# Altium PCB EG2131.PcbDoc
Units mm, origin at the board's own origin, x right, y up, seen from the top; angles counter-clockwise.
Board outline 100.25 x 60.25 mm, 2 copper layers (Top Layer, Bottom Layer); 38 components, 20 nets, 92 pads, 7 vias.
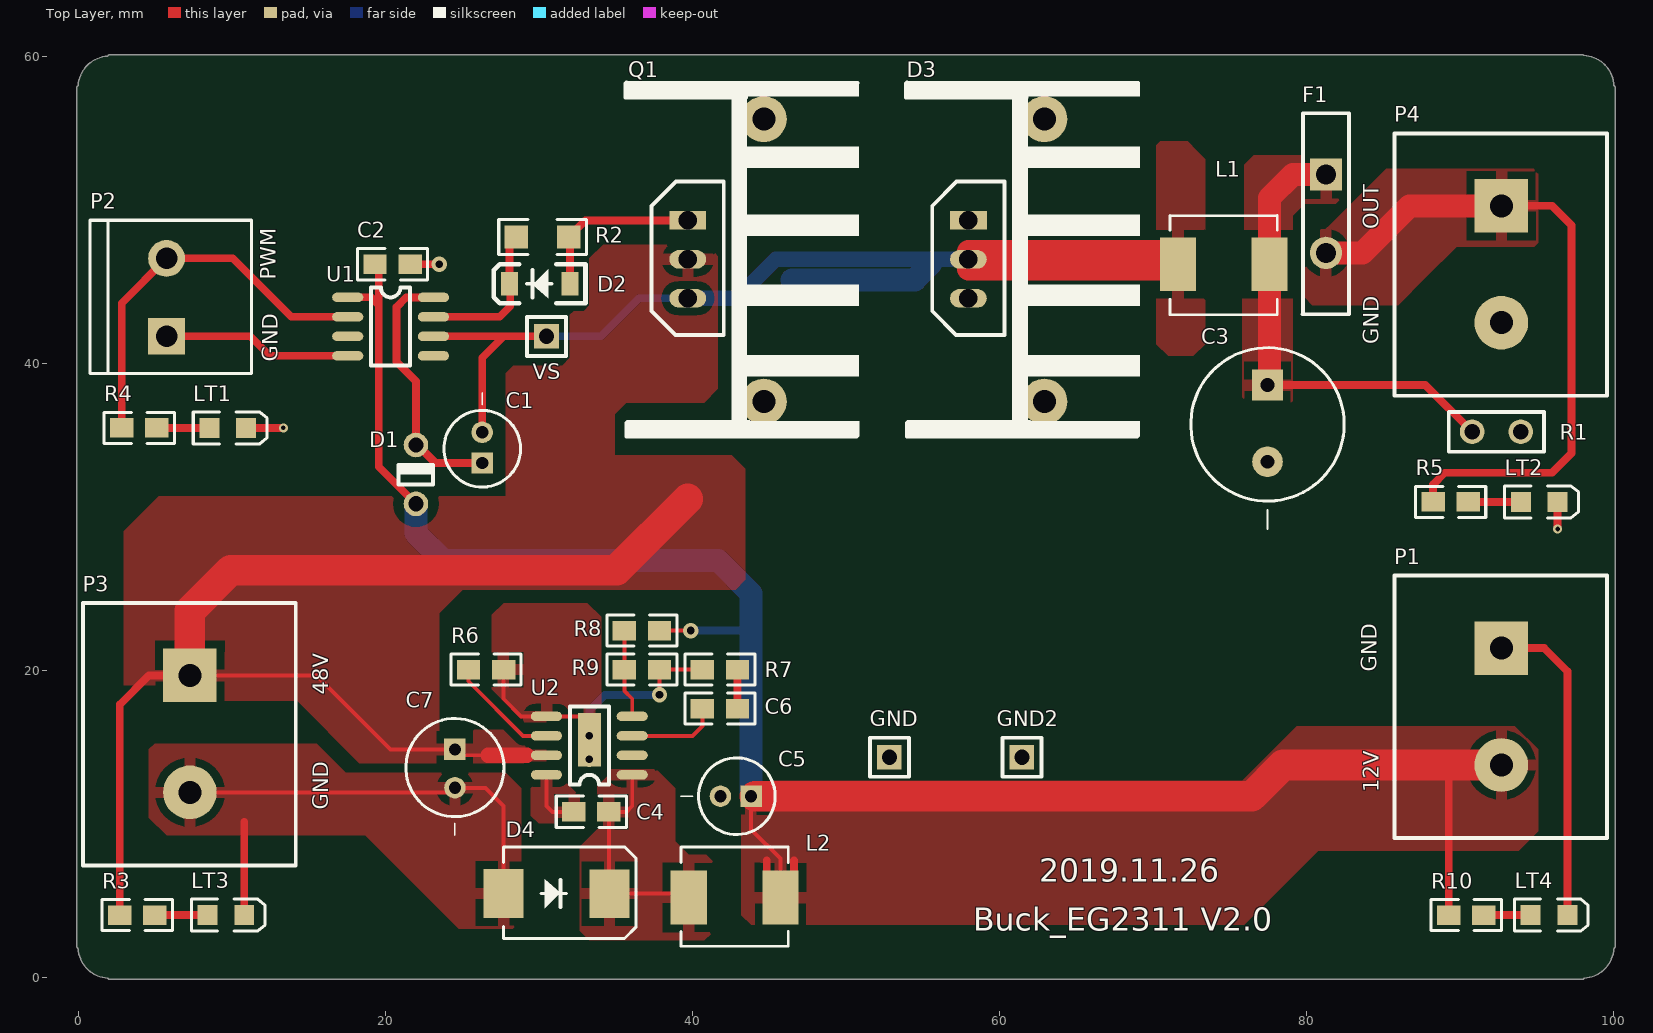
[diagram p0: Top Layer view]
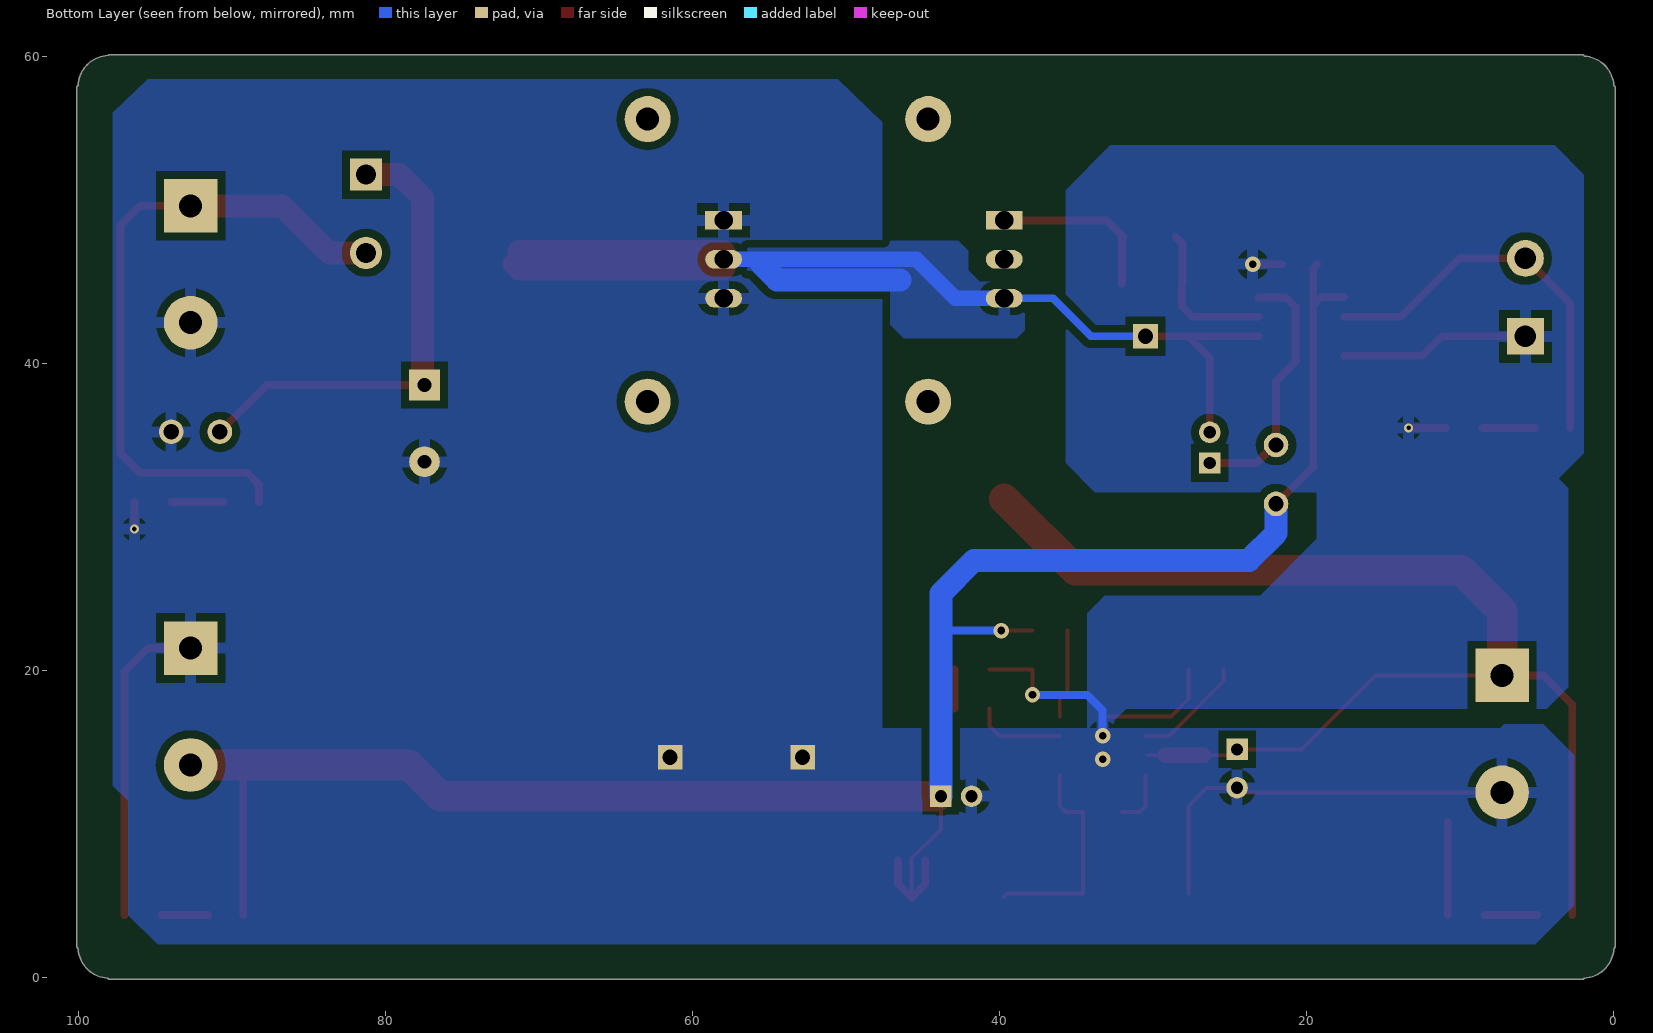
[diagram p1: Bottom Layer view, seen from below]

## Layer stack, top to bottom
Top Layer: signal copper 0.0356
Dielectric: dielectric 0.32, FR-4, Dk 4.8
Bottom Layer: signal copper 0.0356

## Board outline
-0.047,1.882 ccw(c2,2) 1.882,-0.047 ccw(c2,0) 2,-0.127 98,-0.127 ccw(c98,0) 98.118,-0.047 ccw(c98,2) 100.047,1.882 ccw(c100,2) 100.127,2 100.127,58 ccw(c100,58) 100.049,58.118 ccw(c98,58.039) 98.093,60.087 ccw(c98,60) 98,60.127 2,60.127 ccw(c2,60) 1.882,60.047 ccw(c2,58) -0.047,58.118 ccw(c0,58) -0.127,58 -0.127,2 ccw(c0,2)

## Design rules (kind name [scope] priority, off if disabled: settings)
Clearance Polygon [Inpolygon] p1: gap=0.508
Clearance [All] p2: gap=0.254
PolygonConnect [All] p1: connectstyle=Relief reliefconductorwidth=0.75 reliefentries=4 polygonreliefangle="90 Angle"
RoutingVias [All] p1: holewidth=0.5 width=1 viastyle="Through Hole" minholewidth=0.3 minwidth=0.6 maxholewidth=2 maxwidth=2
SilkToSilkClearance [All] p1: silktosilkclearance=0.1
SilkscreenOverComponentPads [All] p1: minsilkscreentomaskgap=0.254
SolderMaskExpansion [All] p1: expansion=0.102
TestPointUsage [All] p1: valid=0 allowmultiple=FALSE
Testpoint [All] p1: side=15 testpointundercomponent=TRUE minsize=1.016 maxsize=2.54 preferedsize=1.524 minholesize=0 maxholesize=1.016 preferedholesize=0.813 testpointgrid=0.025 style=1023 order=0123456789
Width [All] p1: maxlimit=5 minlimit=0.254 preferedwidth=0.254 minimp=50.000000 maximp=50.000000 favimp=50.000000
22 further rules are at their usual default settings.

## Components (designator, comment, footprint, x,y, rotation, side; value= is the part's Value field where it differs from the comment)
C1 "25V-YXJ-47uF-M 5X11，Rubycon" CAP2MM 26.289,33.528 r90 top
C2 "0.1uF/50V，X7R" 0805 20.447,46.482 r180 top
C3 "100V-YXJ-100uF-M 10X20，Rubycon" CAP5MM 77.47,38.608 r270 top
C4 "0.1uF/50V，X7R" 0805 33.401,10.795 r0 top
C5 "25V-YXJ-47uF-M 5X11，Rubycon" CAP2MM 43.815,11.811 r180 top
C6 "470pF/50V" 0805 41.783,17.526 r0 top
C7 "100V-YXJ-22uF-M 6.3X11，Rubycon" CAP2.5MM 24.511,14.859 r270 top
D1 "FR107，MDD" DO-41-3.8 21.971,30.861 r90 top
D2 "LL4148,，MDD" LL4148 32.004,45.212 r180 top
D3 "MBR2060CTG，ON" TO220-HS-2P 61.468,46.736 r270 top
D4 "SS310，MDD" SMC 31.623,5.715 r0 top
F1 "RL60-200，瑞隆源" RL60-110 81.28,52.324 r270 top
GND "Testpoint" TEST 52.832,14.351 r180 top
GND2 "Testpoint" TEST 61.468,14.351 r90 top
L1 "MWSA0603S-220MT，顺络" L_6.6*7.0 78.105,49.784 r180 top
L2 "MWSA0603S-330MT，顺络" L_6.6*7.0 39.243,1.905 r0 top
LT1 "红，0805" led0805 8.509,35.814 r0 top
LT2 "红，0805" led0805 93.98,30.988 r0 top
LT3 "红，0805" led0805 8.382,4.064 r0 top
LT4 "红，0805" led0805 94.615,4.064 r0 top
P1 "KF25C-2P ，间距7.62MM" KF25C-2P 92.71,21.463 r270 top
P2 "KF128-2P ,间距5.08" KF128-2P 5.715,41.783 r90 top
P3 "KF25C-2P ，间距7.62MM" KF25C-2P 7.239,19.685 r270 top
P4 "KF25C-2P ，间距7.62MM" KF25C-2P 92.71,50.292 r270 top
Q1 "IRF540NPbF，英飞凌" TO220-HS-2P 43.18,46.736 r270 top
R1 "10K/1W" 1w 93.98,35.56 r180 top
R2 "22R/F/金属膜" 1206 30.226,48.26 r0 top
R3 "100K/F/金属膜" 0805 3.81,4.064 r0 top
R4 "2K/F/金属膜" 0805 3.937,35.814 r0 top
R5 "10K/F/金属膜" 0805 89.408,30.988 r0 top
R6 "10K/F/金属膜" 0805 26.543,20.066 r180 top
R7 "16K/F/金属膜" 0805 41.783,20.066 r0 top
R8 "150K/F/金属膜" 0805 36.703,22.606 r180 top
R9 "10K/F/金属膜" 0805 36.703,20.066 r0 top
R10 "10K/F/金属膜" 0805 90.424,4.064 r0 top
U1 "EG2131" SO-8 17.526,44.323 r0 top
U2 "MP4560DN，MPS" SO-8-MP4560 36.068,13.208 r180 top
VS "Testpoint" TEST 30.48,41.783 r0 top

## Footprints (in the part's own frame and the unit in brackets; to place one, negate y for a bottom-side part, rotate by r counter-clockwise, add the part's x,y. Pads: shape width x height; smd on the part's side, far side on the other; paste and mask are expansions set on the pad)
1w [mm]
  round 1.6 hole 1: 1(0,0) 2(3.175,0)
  silkscreen extent -1.52,-1.3 4.7,1.3
0805 [mil]
  rect 60x50 smd: 1(45,0) 2(-45,0)
  silkscreen extent -90,-40 90,40
1206 [mil]
  rect 60x60 smd: 1(-67.5,0) 2(67.5,0)
  silkscreen extent -112,-45 112,45
CAP2.5MM [mm]
  rect 1.4x1.4 hole 0.8: 1(0,0)
  round 1.4 hole 0.8: 2(2.5,0)
  silkscreen extent -2.02,-3.2 5.59,3.2
CAP2MM [mm]
  rect 1.4x1.4 hole 0.8: 1(0,0)
  round 1.4 hole 0.8: 2(2,0)
  silkscreen extent -1.57,-2.5 4.57,2.5
CAP5MM [mm]
  rect 2x2 hole 0.9: 1(0,0)
  round 2 hole 0.9: 2(5,0)
  silkscreen extent -2.44,-5 9.4,5
DO-41-3.8 [mm]
  round 1.6 hole 1: 1(0,0) 2(3.841,0)
  silkscreen extent 1.27,-1.14 2.54,1.27
KF25C-2P [mm]
  rect 3.5x3.5 hole 1.5: 1(0,0)
  round 3.5 hole 1.5: 2(7.62,0)
  silkscreen extent -4.72,-6.96 12.38,6.9
KF128-2P [mm]
  rect 2.4x2.4 hole 1.4: 1(0,0)
  round 2.4 hole 1.4: 2(5.08,0)
  silkscreen extent -2.43,-5.54 7.59,4.98
L_6.6*7.0 [mm]
  rect 2.35x3.5 smd: 1(6.477,3.3) 2(0.508,3.3)
  silkscreen extent 0,0.13 7,6.6
led0805 [mm]
  rect 1.3x1.3 smd: 1(0,0) 2(2.4,0)
  silkscreen extent -1.05,-1.05 3.75,1.05
LL4148 [mil]
  rect 43.31x60 smd: 1(0,0) 2(155,0)
  silkscreen extent -40,-50 195,50
RL60-110 [mm]
  rect 2.1x2.1 hole 1.3: 1(0,0)
  round 2.1 hole 1.3: 2(5.1,0)
  silkscreen extent -4,-1.52 9.1,1.5
SMC [mm]
  rect 2.6x3.2 smd: 1(-3.937,-0.254)
  rect 2.6x3.15 smd: 2(2.967,-0.254)
  silkscreen extent -3.94,-3.17 4.7,2.8
SO-8 [mil]
  oval 80x24 smd: 1(0,0) 2(0,-50) 3(0,-100) 4(0,-150) 5(220,-150) 6(220,-100) 7(220,-50) 8(220,0)
  silkscreen extent 60,-175 160,25
SO-8-MP4560 [mil]
  oval 80x24 smd: 1(0,0) 2(0,-50) 3(0,-100) 4(0,-150) 5(220,-150) 6(220,-100) 7(220,-50) 8(220,0)
  rect 59.06x137.8 smd: 5(110,-90)
  silkscreen extent 60,-175 160,25
TEST [mm]
  rect 1.6x1.6 hole 1: 1(0,0)
  silkscreen extent -1.27,-1.27 1.27,1.27
TO220-HS-2P [mm]
  rect 1.2x2.4 hole 1.2: 1(-2.603,-3.493)
  oval 1.2x2.4 hole 1.2: 2(-0.063,-3.492) 3(2.477,-3.492)
  round 3 hole 1.5 unplated: ""(-9.207,1.46) ""(9.207,1.461)
  silkscreen extent -11.62,-7.56 11.49,7.69

## Part data
C1 C5 C7: library part C-E-000042, "电解电容"
C2 C4 C6: library part "Capacitor _non polarized_chip", "贴片电容"
C3: library part "Cap Pol1", "钽电容"
D1 D2 D4: library part 1N4148, "二极管"
D3: library part MBR2060
F1: library part "Fuse 1", "保险丝"
GND GND2 VS: "测试点"
L1 L2: library part Inductor, "功率电感"
LT1 LT2 LT3 LT4: library part LED2, "发光二极管"
P1 P3 P4: library part "Header 2", "栅栏式接线端子"
P2: library part "Header 2", "螺钉式PCB端子"
Q1: library part MOSFET-N, "MOSFET TO-262"
R1: "金属氧化膜电阻"
R2 R3 R4 R5 R6 R7 R8 R9 R10: "贴片电阻"
U1: "оƬ"
U2: library part MP4560, "DCDCоƬ"

## Via types
v1: diameter 1, hole 0.5, Top Layer to Bottom Layer, 5 vias
v2: diameter 0.6, hole 0.3, Top Layer to Bottom Layer, 2 vias

## Nets (pads, with @x,y where several pads share a name; then routed paths per layer and width w, separated by ;. In a path a pad name is that pad's centre, name@x,y a point inside that pad or via, vN(x,y) a via of type N, cw(c..) or ccw(c..) an arc to the next point about the centre after c; other vN are vias at no path point)
12V: C2.1 C5.1 D1.1 L2.1 P1.2 R8.2 R10.2 U1.1 | length 136.1
  Top Layer w0.254: R8.2 v1(39.878,22.606) ; C5.1 43.815,9.652 45.72,7.747 L2.1
  Top Layer w0.5: U1.1 19.05,44.323 19.558,43.815 ; C2.1 19.558,46.228 19.558,43.815 ; D1.1 19.558,33.274 19.558,43.815 ; 44.831,7.62 44.831,6.094 L2.1 46.609,6.094 46.609,7.62 ; 89.154,13.843 89.281,13.716 R10.2
  Top Layer w2: C5.1@44.069,11.811 76.454,11.811 78.486,13.843 89.154,13.843 P1.2
  Bottom Layer w0.254: 43.18,22.606 43.815,21.971
  Bottom Layer w0.508: v1(39.878,22.606) 43.18,22.606
  Bottom Layer w1.5: D1.1 21.971,28.956 23.749,27.178 41.656,27.178 43.815,25.019 43.815,21.971 C5.1
48V: C7.1 P3.1 Q1.2 R3.2 U2.7 | length 84
  Top Layer w0.254: P3.1 15.494,19.685 20.32,14.859 C7.1 24.892,14.478 26.67,14.478 ; 29.21,14.478 U2.7@30.353,14.478
  Top Layer w0.508: R3.2 2.667,17.78 4.572,19.685 P3.1
  Top Layer w1: 26.67,14.478 29.21,14.478
  Top Layer w2: P3.1 7.239,23.876 9.906,26.543 35.052,26.543 39.688,31.178
GND: C2.2 C3.2 C5.2 C7.2 D3.1 D3.3 D4.1 GND2.1 GND.1 LT1.2 LT2.2 LT3.2 LT4.2 P1.1 P2.1 P3.2 P4.2 R1.1 R6.2 R7.2 R9.1 U1.4 U2.5 | length 90.5
  Top Layer w0.254: P3.2 C7.2@24.217,12.065 ; C7.2 26.503,12.359 27.686,11.176 D4.1 ; R6.2 27.686,18.161 28.829,17.018 30.48,17.018 U2.5@32.893,17.018 ; v1(37.846,18.415) R9.1 R7.2
  Top Layer w0.508: P2.1 11.176,41.783 12.446,40.513 U1.4 ; LT3.2 10.782,10.147 ; LT1.2 v2(13.335,35.814) ; C2.2 v1(23.495,46.482) ; P1.1 95.504,21.463 97.015,19.952 LT4.2 ; v2(96.38,29.223) LT2.2
  Bottom Layer w0.508: v1@33.274,15.621 33.274,17.399 34.29,18.415 v1(37.846,18.415)
  other v1: 33.274,14.224 33.274,15.748
NetC4_2: C4.2 U2.8 | length 3.7
  Top Layer w0.254: U2.8 30.48,11.176 30.861,10.795 C4.2@32.004,10.795
NetC6_1: C6.1 R7.1 | length 2.5
  Top Layer w0.508: C6.1 R7.1
NetC6_2: C6.2 U2.3 | length 6
  Top Layer w0.254: U2.3 40.005,15.748 40.64,16.383 C6.2
NetD2_1: D2.1 Q1.1 R2.2 | length 11.3
  Top Layer w0.508: D2.1 32.004,48.197 R2.2 33.02,49.34 Q1.1
NetD2_2: D2.2 R2.1 U1.7 | length 9.9
  Top Layer w0.508: U1.7 27.432,43.053 28.118,43.739 D2.2@28.118,45.085 ; D2.2 28.067,47.816 R2.1
NetLT1_1: LT1.1 R4.1 | length 3.4
  Top Layer w0.508: R4.1 LT1.1
NetLT2_1: LT2.1 R5.1 | length 3.4
  Top Layer w0.508: R5.1 LT2.1
NetLT3_1: LT3.1 R3.1 | length 3.4
  Top Layer w0.508: R3.1 LT3.1
NetLT4_1: LT4.1 R10.1 | length 3
  Top Layer w0.5: R10.1 LT4.1
NetR6_1: R6.1 U2.6 | length 7.3
  Top Layer w0.254: R6.1 25.4,19.304 28.956,15.748 U2.6
NetR8_1: R8.1 R9.2 U2.4 | length 5.8
  Top Layer w0.254: R8.1 R9.2 35.56,18.669 36.068,18.161 U2.4
OUT1: F1.2 P4.1 R5.2 | length 43.7
  Top Layer w0.508: R5.2 88.265,32.131 89.027,32.893 96.012,32.893 97.282,34.163 97.282,49.022 96.012,50.292 P4.1
  Top Layer w1.5: F1.2 83.673,47.224 86.741,50.292 P4.1
OUT1': C3.1 F1.1 L1.2 R1.2 | length 31.2
  Top Layer w0.508: C3.1 87.757,38.608 R1.2
  Top Layer w1.5: C3.1 77.597,38.735 L1.2 77.597,50.8 79.121,52.324 F1.1
PWM1: P2.2 R4.2 U1.2 | length 25.6
  Top Layer w0.5: P2.2 10.033,46.863 13.843,43.053 U1.2
  Top Layer w0.508: R4.2 2.794,43.942 P2.2
SW: C4.1 D4.2 L2.2 U2.1 | length 14.3
  Top Layer w0.254: U2.1 36.068,11.176 35.687,10.795 C4.1 34.544,5.507 D4.2 39.495,5.461 L2.2
VB: C1.1 D1.2 U1.8 | length 16.9
  Top Layer w0.508: U1.8 21.336,44.323 20.701,43.688 20.701,40.132 21.971,38.862 21.971,36.861 21.971,34.798 23.241,33.528 C1.1
VS: C1.2 D3.2 L1.1 Q1.3 U1.6 VS.1 | length 80.4
  Top Layer w0.508: U1.6 27.686,41.783 ; C1.2 26.289,40.386 27.686,41.783 ; VS.1 27.686,41.783
  Top Layer w1.5: 57.975,46.164 L1.1@71.312,46.164 ; D3.2@57.975,47.307 L1.1@71.312,47.307 ; L1.1@71.312,46.799 L1.1
  Bottom Layer w0.508: VS.1 34.036,41.783 36.512,44.259 Q1.3
  Bottom Layer w1: Q1.3 42.862,44.259 45.402,46.799 55.499,46.799 ; 55.499,46.736 55.499,46.799 ; D3.2 55.499,46.799
  Bottom Layer w1.5: 46.482,45.466 54.483,45.466 55.499,46.482
pads on no net: D3. Q1. U1.3 U1.5 U2.2

## Polygon pours and split planes (outlines as drawn)
48V on Top Layer "Bottom Layer-No Net" (solid): 38.862,47.752 34.163,47.752 33.274,46.863 33.274,43.815 32.893,43.434 32.258,43.434 32.004,43.18 32.004,40.386 31.496,39.878 28.321,39.878 27.813,39.37 27.813,30.734 28.829,29.718 33.528,29.718 34.417,30.607 34.925,31.115 34.925,35.306 34.925,36.703 35.687,37.465 40.767,37.465 41.656,38.354 41.656,46.99 40.894,47.752 38.862,47.752
48V on Top Layer "Bottom Layer-No Net" (solid, pour order 1000): 7.239,21.209 17.145,21.209 22.225,16.129 26.543,16.129 27.559,15.113 27.559,14.732 26.797,13.97 18.288,13.97 14.224,18.034 7.366,18.034 7.239,17.907 7.239,21.082
SW on Top Layer "Bottom Layer-No Net" (solid, pour order 1001): 36.449,13.462 37.719,13.462 38.862,12.319 38.862,8.89 39.751,8.001 40.894,8.001 41.402,7.493 41.402,3.048 40.767,2.413 33.274,2.413 32.639,3.048 32.639,8.509 33.401,9.271 33.782,9.652 33.782,11.557 33.782,12.446 34.798,13.462 36.449,13.462
12V on Top Layer "Bottom Layer-No Net" (solid, pour order 1002): 43.18,12.192 43.18,8.89 44.45,7.62 44.45,3.556 44.958,3.048 46.99,3.048 47.498,3.556 47.498,11.43 46.736,12.192 43.18,12.192
GND on Top Layer "Bottom Layer-No Net" (solid, pour order 1003): 26.924,20.574 26.924,23.622 27.686,24.384 33.147,24.384 34.036,23.495 34.036,16.764 28.956,16.764 26.924,18.796 26.924,20.574
GND on Top Layer "Bottom Layer-No Net" (solid, pour order 1004): 6.731,15.24 15.494,15.24 17.399,13.335 27.813,13.335 28.829,12.319 28.829,3.683 28.321,3.175 24.765,3.175 23.876,4.064 18.669,9.271 5.715,9.271 4.572,10.414 4.572,14.859 4.953,15.24 6.731,15.24
OUT1' on Top Layer "Bottom Layer-No Net" (solid, pour order 1005): 75.946,47.117 75.946,52.959 76.581,53.594 81.915,53.594 82.423,53.086 82.423,50.927 81.915,50.419 79.883,50.419 79.121,49.657 79.121,37.465 78.613,36.957 76.581,36.957 75.819,37.719 75.819,46.99 75.946,47.117
VS on Top Layer "Bottom Layer-No Net" (solid, pour order 1006): 70.485,54.483 72.263,54.483 72.898,53.848 73.406,53.34 73.406,50.038 73.406,41.275 72.644,40.513 70.993,40.513 70.231,41.275 70.231,54.229 70.485,54.483
OUT1 on Top Layer "Bottom Layer-No Net" (solid, pour order 1007): 81.407,48.895 85.217,52.705 93.472,52.705 94.869,52.705 95.123,52.451 95.123,48.387 95.123,47.879 94.869,47.625 89.789,47.625 87.757,45.593 85.979,43.815 81.153,43.815 80.391,43.815 79.883,44.323 79.883,48.387 80.391,48.895 81.407,48.895
48V on Top Layer "Bottom Layer-No Net" (solid, pour order 1008): 2.921,19.05 2.921,29.083 4.445,30.607 5.207,31.369 29.083,31.369 30.861,31.369 33.528,34.036 42.545,34.036 43.434,33.147 43.434,25.908 42.799,25.273 25.019,25.273 23.495,23.749 23.495,15.113 23.241,14.859 19.304,14.859 15.113,19.05 2.921,19.05
48V on Top Layer "Bottom Layer-No Net" (solid, pour order 1009): 26.289,16.129 27.94,16.129 28.702,15.367 28.956,15.113 29.464,15.113 29.845,14.732 29.845,14.478 29.845,14.224 29.591,13.97 26.416,13.97 26.289,14.097 26.289,16.129
12V on Top Layer "Bottom Layer-No Net" (solid, pour order 1010): 43.815,12.827 75.819,12.827 78.105,15.113 79.375,16.383 92.71,16.383 93.599,16.383 95.123,14.859 95.123,9.525 93.853,8.255 80.772,8.255 76.835,4.318 75.946,3.429 43.815,3.429 43.18,4.064 43.18,5.715 43.18,12.192 43.815,12.827
NetC4_2 on Top Layer "Bottom Layer-No Net" (solid, pour order 1012): 29.464,13.081 29.464,10.541 29.972,10.033 32.385,10.033 32.766,10.414 32.766,10.668 32.766,11.684 31.369,13.081 29.464,13.081
VS on Bottom Layer "Bottom Layer-No Net" (solid): 39.624,45.339 41.275,45.339 42.037,46.101 42.037,47.371 42.672,48.006 46.99,48.006 58.547,48.006 59.182,47.371 59.182,45.847 58.801,45.466 48.514,45.466 47.498,44.45 47.498,42.926 46.228,41.656 38.862,41.656 38.354,42.164 38.354,44.831 38.862,45.339 39.624,45.339
GND on Bottom Layer "Bottom Layer-No Net" (solid, pour order 1013): 7.366,16.256 74.041,16.256 82.296,24.511 95.631,24.511 96.774,23.368 96.774,4.064 94.869,2.159 5.08,2.159 2.54,4.699 2.54,14.478 4.572,16.51 7.112,16.51 7.366,16.256
GND on Bottom Layer "Bottom Layer-No Net" (solid, pour order 1014): 57.023,58.547 95.504,58.547 97.79,56.343 97.79,12.505 95.885,10.668 50.927,10.668 47.625,13.852 47.625,55.731 50.546,58.547 57.023,58.547
GND on Bottom Layer "Bottom Layer-No Net" (solid, pour order 1015): 5.207,54.229 32.766,54.229 35.687,51.308 35.687,33.528 33.782,31.623 4.445,31.623 1.905,34.163 1.905,52.324 3.81,54.229 5.207,54.229
GND on Bottom Layer "Bottom Layer-No Net" (solid, pour order 1016): 19.304,32.893 19.304,28.575 22.987,24.892 33.147,24.892 34.29,23.749 34.29,15.113 34.163,14.986 32.639,14.986 32.512,14.859 32.512,16.764 31.75,17.526 4.318,17.526 2.921,18.923 2.921,31.877 3.937,32.893 19.304,32.893

## Silkscreen, mask and mechanical layers (free items; w line width, h text height)
Top Overlay:
  text "OUT" at 84.709,48.768 h1 r90
  text "PWM" at 12.827,45.466 h1 r90
  text "GND" at 84.709,41.275 h1 r90
  text "GND" at 12.954,40.132 h1 r90
  text "GND" at 84.582,19.939 h1 r90
  text "48V" at 16.256,18.415 h1 r90
  text "12V" at 84.709,12.065 h1 r90
  text "GND" at 16.256,10.922 h1 r90
  text "2019.11.26" at 62.611,6.223 h1.5
  text "Buck_EG2311 V2.0" at 58.293,3.048 h1.5
Mechanical 1:
  lines w0.1: 0,2 ccw(c2,2) 1.955,0.001 ; 0.001,58.045 cw(c2,58) 2,60 ; 98,0 ccw(c98,2) 99.999,1.955 ; 98.045,60.038 cw(c98,58.039) 100,58.039
  lines w0.254: 0,2 0,58 ; 2,0 98,0 ; 2,60 98,60 ; 100,2 100,58

## Dimensions
0,2 to 100,2 on Mechanical 1
2,0 to 2,60 on Mechanical 1